# Altium PCB PCB.PcbDoc
Units mm, origin at the board's own origin, x right, y up, seen from the top; angles counter-clockwise.
Board outline 22.18 x 37.45 mm, 2 copper layers (Top Layer, Bottom Layer), stack 1.271 mm thick; 40 components, 25 nets, 127 pads, 61 vias.
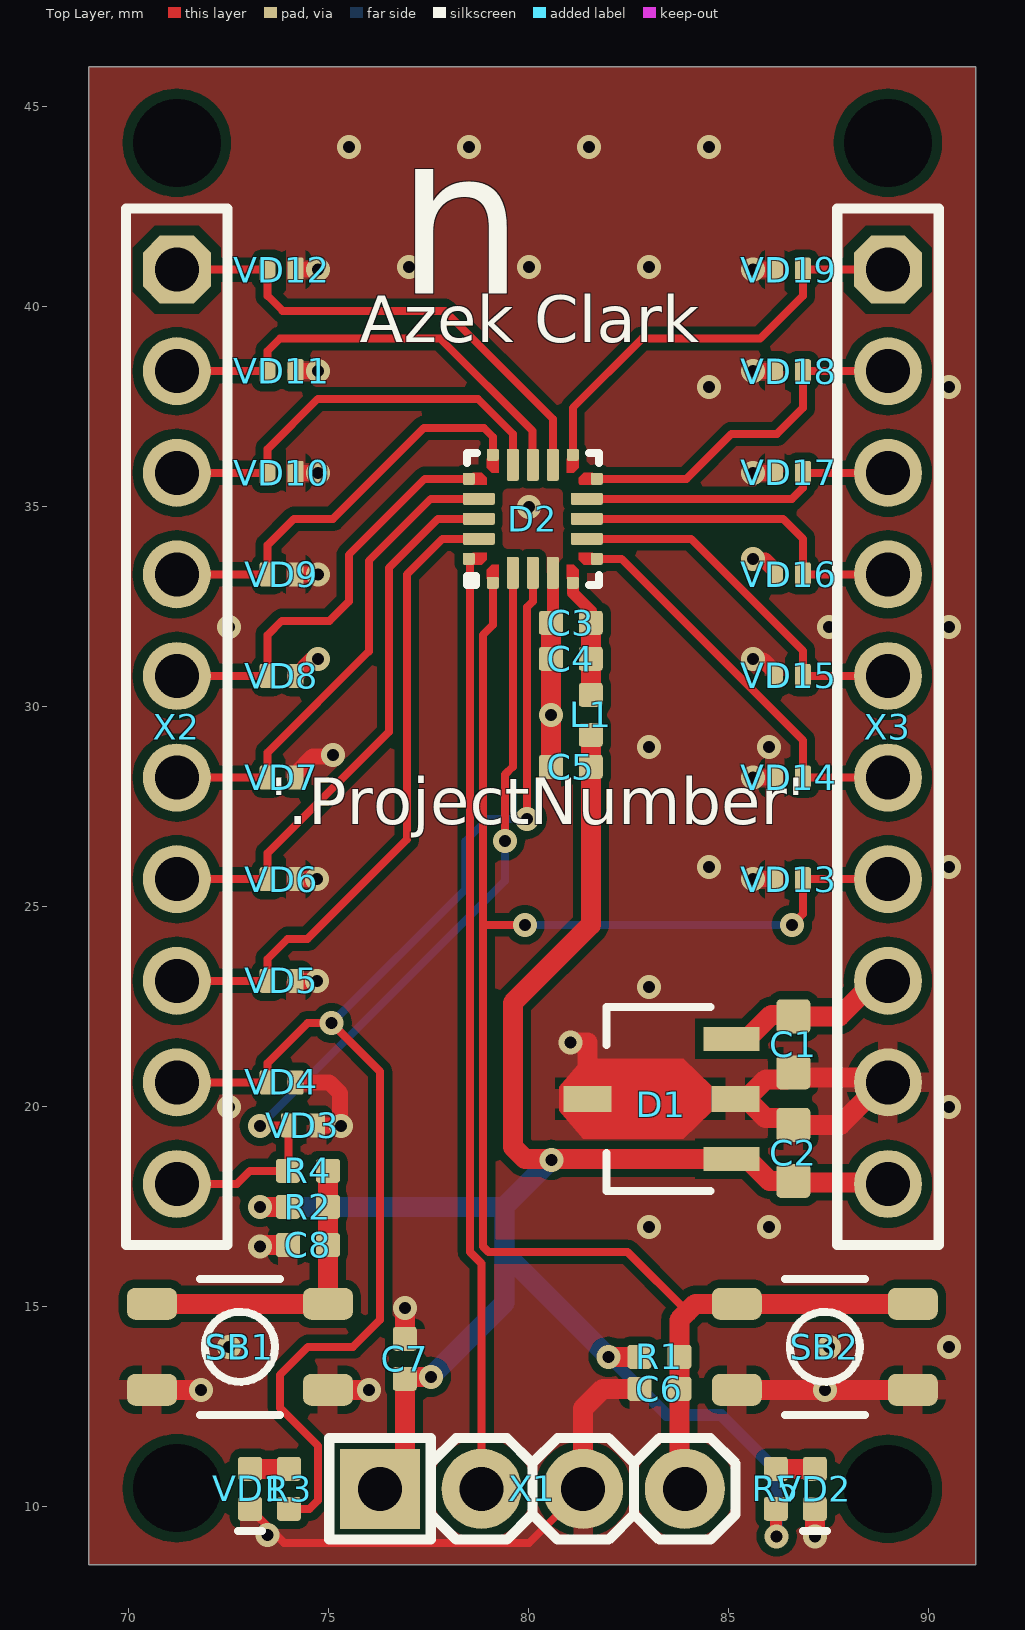
[diagram p0: Top Layer view]
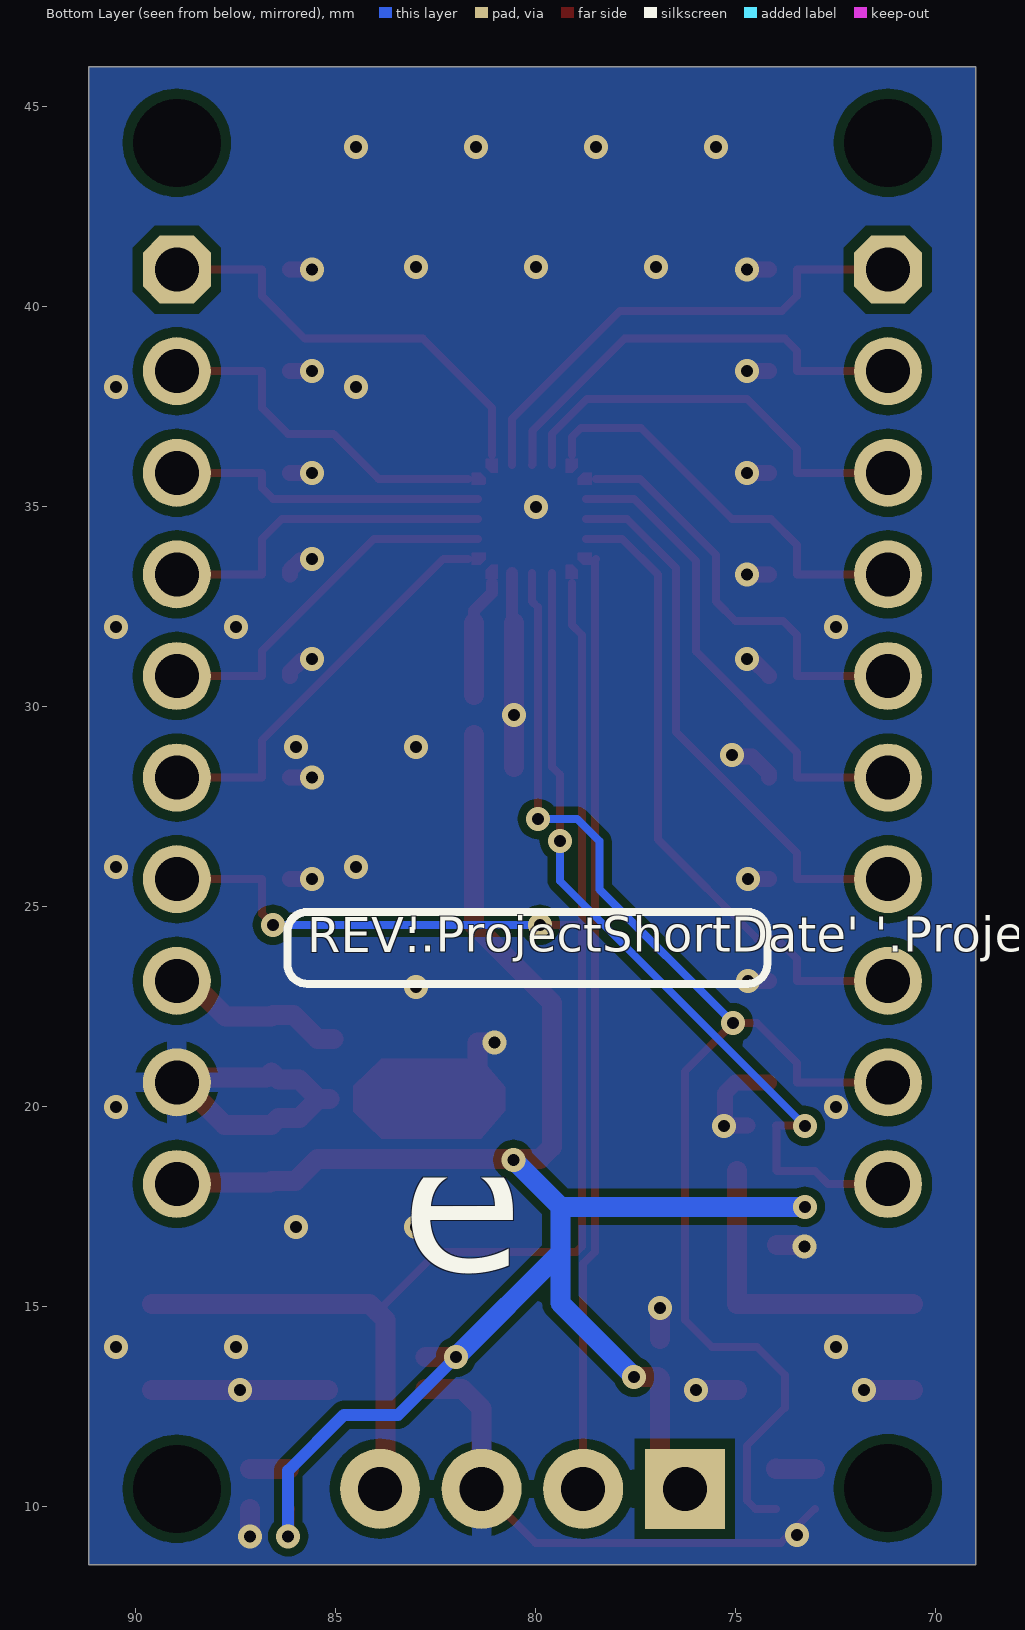
[diagram p1: Bottom Layer view, seen from below]
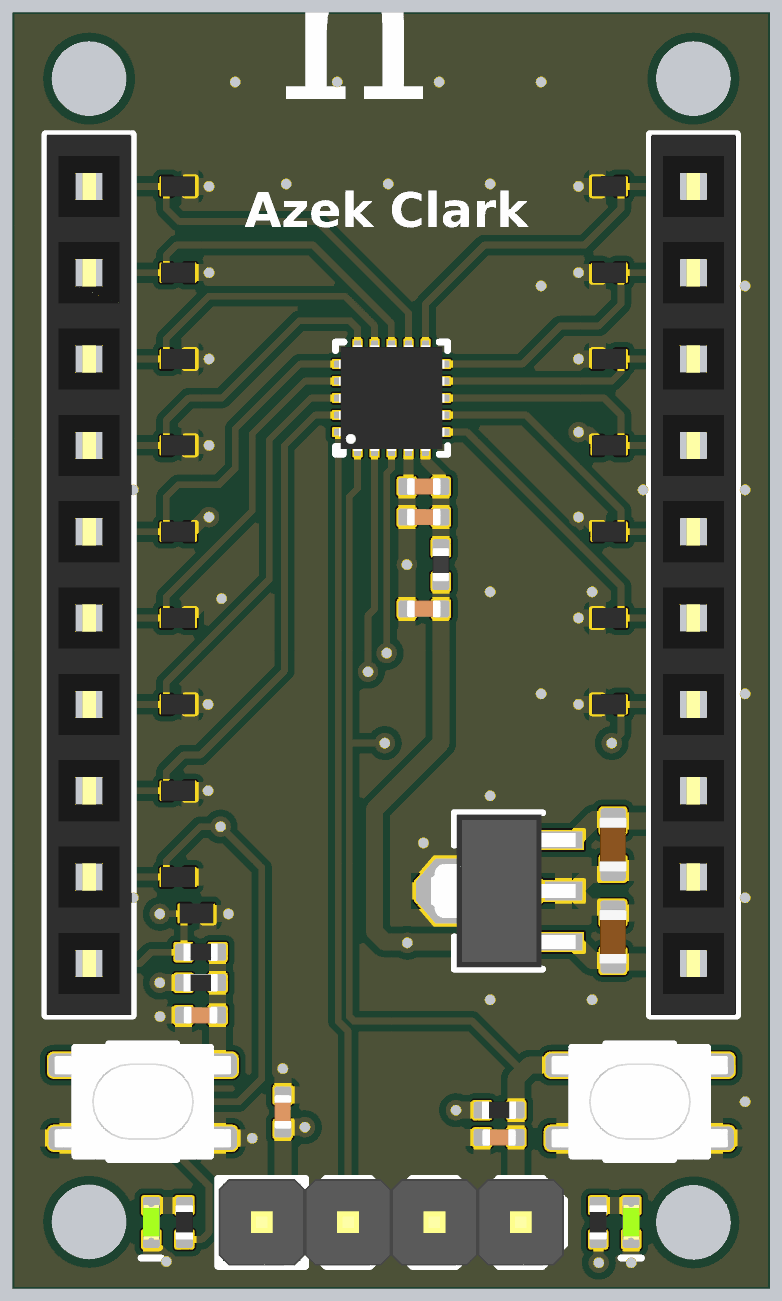
[diagram p2: 3D render of the assembled board from above, using the file's embedded part models]

## Layer stack, top to bottom
Top Solder: solder mask 0.0102, Solder Resist, Dk 3.5
Top Layer: signal copper 0.0356
Dielectric 1: dielectric 1.2, FR-4, Dk 4.8
Bottom Layer: signal copper 0.0356
Bottom Solder: solder mask 0.0102, Solder Resist, Dk 3.5

## Board outline
69,8.55 69,46 91.18,46 91.18,8.55

## Design rules (kind name [scope] priority, off if disabled: settings)
AcuteAngle [All] p1: minimum=4.50000000000000E+0001 checktracksonly=TRUE
BoardOutlineClearance [All] p1: gap=0.3 ignorepadtopadclearanceinfootprint=FALSE
Clearance Clearance_NPTH [All vs InPadClass('NPTH')] p1: gap=0.4 ignorepadtopadclearanceinfootprint=FALSE except(0: Arc-Hole Track-Hole SMDPad-Hole THPad-Hole Via-Hole Fill-Hole Poly-Hole Region-Hole Text-Hole)
Clearance Clearance_MultiLayerPad [OnLayer('Multi-Layer') and IsPad] p2: gap=0.25 ignorepadtopadclearanceinfootprint=FALSE except(0: Arc-Hole Track-Hole SMDPad-Hole THPad-Hole Via-Hole Fill-Hole Poly-Hole Region-Hole Text-Hole)
Clearance Clearance_Polygon [InPolygon] p3: gap=0.2 ignorepadtopadclearanceinfootprint=FALSE except(0: Arc-Hole Track-Hole SMDPad-Hole THPad-Hole Via-Hole Fill-Hole Poly-Hole Region-Hole Text-Hole)
Clearance [All] p4: gap=0.15 ignorepadtopadclearanceinfootprint=FALSE except(0: Arc-Hole Track-Hole SMDPad-Hole THPad-Hole Via-Hole Fill-Hole Poly-Hole Region-Hole Text-Hole; 0.127: Arc-Arc Arc-Track Track-Track)
ComponentClearance [All] p1: gap=0.254 collisioncheckmode=3 verticalgap=0.2 showdistances=FALSE
DiffPairsRouting [All] p1: maxlimit=0.254 minlimit=0.2 mostfreqgap=0.254 toplayer_minwidth=0.2 toplayer_maxwidth=0.5 toplayer_prefwidth=0.3 bottomlayer_minwidth=0.2 bottomlayer_maxwidth=0.5 bottomlayer_prefwidth=0.3 maxuncoupledlength=12.7
Height [All] p1: minheight=0 maxheight=60 prefheight=12.7
HoleSize [All] p1: absolutevalues=TRUE maxlimit=6.3 minlimit=0.3 maxpercent=80.000 minpercent=20.000
HoleToHoleClearance [All] p1: gap=0.5 allowstackedmicrovias=TRUE
MinimumAnnularRing [All] p1: minimumring=0.13
MinimumSolderMaskSliver [All] p1: minsoldermaskwidth=0.05
PasteMaskExpansion [All] p1: expansion=-0.05
PlaneClearance [All] p1: clearance=0.5
PlaneConnect [All] p1: planeconnectstyle=Relief reliefexpansion=0.5 reliefentries=4 reliefconductorwidth=0.3 reliefairgap=0.2
PolygonConnect PolygonConnect_PowerPAD [All vs InPadClass('PowerPAD')] p1: connectstyle=Relief reliefconductorwidth=1 reliefentries=4 polygonreliefangle="90 Angle" airgapwidth=0.3
PolygonConnect PolygonConnect_PadGND [InNet('GND') and IsPad] p2: connectstyle=Relief reliefconductorwidth=0.5 reliefentries=4 polygonreliefangle="90 Angle" airgapwidth=0.2
PolygonConnect PolygonConnect_Via [IsVia] p3: connectstyle=Direct reliefconductorwidth=0.254 reliefentries=4 polygonreliefangle="90 Angle" airgapwidth=0.254
PolygonConnect [All] p4: connectstyle=Relief reliefconductorwidth=0.6 reliefentries=4 polygonreliefangle="90 Angle" airgapwidth=0.3
RoomDefinition Power-LED [InComponentClass('Power-LED')] p1: confinementstyle=ConfineIn formatcopy=TRUE lockcomponents=FALSE outline 85.571,9.346 85.571,11.554 86.496,11.554 87.804,11.554 87.804,9.046 86.496,9.046 86.496,9.346
RoomDefinition PowerSupply [InComponentClass('PowerSupply')] p2: confinementstyle=ConfineIn formatcopy=TRUE lockcomponents=FALSE outline 87.344,22.992 87.344,20.134 87.344,17.421 85.886,17.421 85.886,17.546 80.361,17.546 80.361,22.854 85.886,22.854 85.886,22.992
RoomDefinition MCU-Debug [InComponentClass('MCU-Debug')] p3: confinementstyle=ConfineIn formatcopy=TRUE lockcomponents=FALSE outline 74.629,8.799 74.629,12.101 76.296,12.101 76.296,14.804 84.271,14.804 84.271,16.054 90.529,16.054 90.529,11.946 85.551,11.946 85.551,8.799
RoomDefinition MCU [InComponentClass('MCU')] p4: confinementstyle=ConfineIn formatcopy=TRUE lockcomponents=FALSE outline 82.154,27.896 79.946,27.896 79.946,32.646 78.096,32.646 78.096,36.754 82.204,36.754 82.204,32.646 82.154,32.646
RoomDefinition Connector-side-2 [InComponentClass('Connector-side-2')] p5: confinementstyle=ConfineIn formatcopy=TRUE lockcomponents=FALSE outline 85.648,25.086 85.648,41.534 87.329,41.534 87.329,42.835 90.631,42.835 90.631,16.165 87.329,16.165 87.329,25.086
RoomDefinition Connector-side-1 [InComponentClass('Connector-side-1')] p6: confinementstyle=ConfineIn formatcopy=TRUE lockcomponents=FALSE outline 69.549,16.165 69.549,42.835 72.851,42.835 72.851,41.534 74.677,41.534 74.677,20.142 75.208,20.142 75.208,18.934 72.851,18.934 72.851,16.165
RoomDefinition Button-LED [InComponentClass('Button-LED')] p7: confinementstyle=ConfineIn formatcopy=TRUE lockcomponents=FALSE outline 69.651,11.946 69.651,16.054 73.376,16.054 73.376,19.004 75.584,19.004 75.584,18.104 75.584,17.15 75.584,16.054 75.909,16.054 75.909,11.946 74.608,11.946 74.608,9.346 73.684,9.346 73.684,9.046 72.376,9.046 72.376,11.946
RoutingVias [All] p1: holewidth=0.3 width=0.7 viastyle="Through Hole" minholewidth=0.3 minwidth=0.6 maxholewidth=0.5 maxwidth=1.2
SilkToSilkClearance [All] p1: silktosilkclearance=0
SilkToSolderMaskClearance [IsPad] p1: minsilkscreentomaskgap=0.15 clearancetoexposedcopper=TRUE
SolderMaskExpansion SolderMaskExpansion_ML [OnLayer('Multi-Layer') and IsPad] p1: expansion=0.1 istentingtop=FALSE
SolderMaskExpansion SolderMaskExpansion_VIa [isVia] p2: expansion=0.102 istentingtop=TRUE
SolderMaskExpansion [All] p3: expansion=0.05 istentingtop=FALSE
UnRoutedNet [All] p1: checkbadconnections=TRUE
Width [All] p1: maxlimit=10 minlimit=0.127 preferedwidth=0.2
18 further rules are at their usual default settings.

## Classes and differential pairs
component class Power-LED: R5 VD2
component class PowerSupply: C1 C2 D1
component class MCU: C3 C4 C5 D2 L1
component class MCU-Debug: C6 C7 R1 SB2 X1
component class Connector-side-2: VD13 VD14 VD15 VD16 VD17 VD18 VD19 X3
component class Connector-side-1: VD3 VD4 VD5 VD6 VD7 VD8 VD9 VD10 VD11 VD12 X2
component class Button-LED: C8 R2 R3 R4 SB1 VD1

## Components (designator, comment, footprint, x,y, rotation, side; value= is the part's Value field where it differs from the comment)
C1 "1µF" CH0603CM 86.615,21.563 r90 top
C2 "1µF" CH0603CM 86.615,18.85 r270 top
C3 "10nF" CH0402C 81.05,32.1 r0 top
C4 "100nF" CH0402C 81.05,31.2 r0 top
C5 "100nF" CH0402C 81.05,28.5 r0 top
C6 "100nF" CH0402C 83.265,12.95 r0 top
C7 "100nF" CH0402C 76.9,13.7 r270 top
C8 "100nF" CH0402C 74.48,16.546 r0 top
D1 "L78L33ACUTR" SOT89_123 83.265,20.2 r180 top
D2 "STM8L101F3U6TR" 20-UFQFPN 80.1,34.7 r90 top
L1 "120Ω @ 100MHz" CH0402L 81.55,29.8 r90 top
R1 "100k" CH0402R 83.265,13.75 r180 top
R2 "100k" CH0402R 74.48,17.5 r180 top
R3 "150" CH0402R 74.004,10.45 r270 top
R4 "0" CH0402R 74.48,18.4 r0 top
R5 "150" CH0402R 86.175,10.45 r270 top
SB1 "\"Кнопка\"" "BUT: YTS-A017" 72.78,14 r180 top
SB2 "\"Кнопка\"" "BUT: YTS-A017" 87.4,14 r180 top
VD1 "Blue" CH0402LG 73.03,10.45 r90 top
VD2 "Blue" CH0402LG 87.15,10.45 r90 top
VD3 "Rclamp3311P-N" DFN1006-2 74.354,19.538 r0 top
VD4 "Rclamp3311P-N" DFN1006-2 73.823,20.61 r0 top
VD5 "Rclamp3311P-N" DFN1006-2 73.823,23.15 r0 top
VD6 "Rclamp3311P-N" DFN1006-2 73.823,25.69 r0 top
VD7 "Rclamp3311P-N" DFN1006-2 73.823,28.23 r0 top
VD8 "Rclamp3311P-N" DFN1006-2 73.823,30.77 r0 top
VD9 "Rclamp3311P-N" DFN1006-2 73.823,33.31 r0 top
VD10 "Rclamp3311P-N" DFN1006-2 73.823,35.85 r0 top
VD11 "Rclamp3311P-N" DFN1006-2 73.823,38.39 r0 top
VD12 "Rclamp3311P-N" DFN1006-2 73.823,40.93 r0 top
VD13 "Rclamp3311P-N" DFN1006-2 86.502,25.69 r180 top
VD14 "Rclamp3311P-N" DFN1006-2 86.502,28.23 r180 top
VD15 "Rclamp3311P-N" DFN1006-2 86.502,30.77 r180 top
VD16 "Rclamp3311P-N" DFN1006-2 86.502,33.31 r180 top
VD17 "Rclamp3311P-N" DFN1006-2 86.502,35.85 r180 top
VD18 "Rclamp3311P-N" DFN1006-2 86.502,38.39 r180 top
VD19 "Rclamp3311P-N" DFN1006-2 86.502,40.93 r180 top
X1 "*" "CON: PLS-4" 80.09,10.45 r0 top
X2 "PBSL-10" "CON: PBSL-10" 71.2,29.5 r270 top
X3 "PBSL-10" "CON: PBSL-10" 88.98,29.5 r270 top

## Footprints (in the part's own frame and the unit in brackets; to place one, negate y for a bottom-side part, rotate by r counter-clockwise, add the part's x,y. Pads: shape width x height; smd on the part's side, far side on the other; paste and mask are expansions set on the pad)
20-UFQFPN [mm] "UFQFPN20  20-lead, 3x3 mm, 0.5 mm pitch"
  rrect25% 0.3x0.3 smd: 1(-1.6,1) 5(-1.6,-1) 6(-1,-1.6) 10(1,-1.6) 11(1.6,-1) 15(1.6,1) 16(1,1.6) 20(-1,1.6)
  rrect25% 0.8x0.3 smd: 2(-1.35,0.5) 3(-1.35,0) 4(-1.35,-0.5) 12(1.35,-0.5) 13(1.35,0) 14(1.35,0.5)
  rrect25% 0.3x0.8 smd: 7(-0.5,-1.35) 8(0,-1.35) 9(0.5,-1.35) 17(0.5,1.35) 18(0,1.35) 19(-0.5,1.35)
  Top Layer region: -1.5,-1.15 -1.5,-1.15 -1.275,-1.15 -1.275,-1.15 -1.15,-1.025 -1.15,-0.85 -1.5,-0.85
  Top Layer region: -1.025,-1.15 -1.15,-1.275 -1.15,-1.5 -1.15,-1.5 -0.85,-1.5 -0.85,-1.15
  Top Layer region: 1.15,-1.5 1.15,-1.275 1.025,-1.15 0.9,-1.15 0.881,-1.154 0.865,-1.165 0.854,-1.181 0.85,-1.2 0.85,-1.2 0.85,-1.5
  Top Layer region: 1.15,-1.025 1.275,-1.15 1.5,-1.15 1.5,-1.15 1.5,-0.85 1.15,-0.85
  Top Layer region: -1.15,1.5 -1.15,1.5 -1.15,1.275 -1.15,1.275 -1.025,1.15 -0.85,1.15 -0.85,1.5
  Top Layer region: -1.15,1.025 -1.275,1.15 -1.5,1.15 -1.5,1.15 -1.5,0.85 -1.15,0.85
  Top Layer region: 1.025,1.15 1.15,1.275 1.15,1.5 1.15,1.5 0.85,1.5 0.85,1.15
  Top Layer region: 1.5,1.15 1.5,1.15 1.275,1.15 1.275,1.15 1.15,1.025 1.15,0.85 1.5,0.85
  silkscreen extent -1.65,-1.65 1.65,1.65, body extent -1.55,-1.55 1.55,1.55, height 0.55
"BUT: YTS-A017" [mm] "Tactile button 5.2x3.4x2.5 SMD"
  rrect50% 1.25x0.8 smd: 1(-2.2,1.075) 1(2.2,1.075) 2(-2.2,-1.075) 2(2.2,-1.075)
  silkscreen extent -1,-1.7 1,1.7, body extent -2.6,-1.7 2.6,1.7, height 2.5
CH0402C [mm]
  rrect25% 0.6x0.6 smd: 1(-0.5,0) 2(0.5,0)
  body extent -0.5,-0.25 0.5,0.25, height 0.5
CH0402L [mm]
  rrect25% 0.6x0.6 smd: 1(-0.5,0) 2(0.5,0)
  body extent -0.5,-0.25 0.5,0.25, height 0.5
CH0402LG [mm]
  rrect25% 0.6x0.6 smd: 1(0.5,0) 2(-0.5,0)
  silkscreen extent -1.05,-0.3 -1.05,0.3, body extent -0.5,-0.25 0.5,0.25, height 0.4
CH0402R [mm]
  rrect25% 0.6x0.6 smd: 1(-0.5,0) 2(0.5,0)
  body extent -0.5,-0.25 0.5,0.26, height 0.33
CH0603CM [mm] "Chip Capacitor, 2-Leads, Body 1,53x0,85mm, IPC Medium Density"
  rrect25% 0.85x0.85 smd: 1(-0.7,0) 2(0.7,0)
  body extent -0.8,-0.4 0.8,0.4, height 0.6
"CON: PBSL-10" [mm] "Female header 2.54mm pitch, pin lengh 11mm"
  oct 1.7x1.7 hole 1.1: 1(-11.43,0)
  round 1.7 hole 1.1: 2(-8.89,0) 3(-6.35,0) 4(-3.81,0) 5(-1.27,0) 6(1.27,0) 7(3.81,0) 8(6.35,0) 9(8.89,0) 10(11.43,0)
  silkscreen extent -12.95,-1.27 12.95,1.27, body extent -12.95,-1.25 12.95,1.25, height 8.5
"CON: PLS-4" [mm] "PLS-40 4 pin header"
  rect 2x2 hole 1.1: 1(-3.81,0)
  round 2 hole 1.1: 2(-1.27,0) 3(1.27,0) 4(3.81,0)
  silkscreen extent -5.08,-1.27 5.08,1.27, body extent -5.08,-1.27 5.08,1.27, height 8.54
DFN1006-2 [mm] "2-Leads, Body 1.0x0.6mm (max), Pitch 0,65mm"
  rrect25% 0.4x0.6 smd: 1(0.35,0) 2(-0.35,0)
  body extent -0.5,-0.3 0.5,0.3, height 0.6
SOT89_123 [mm] "SOT89, 3-Leads, Body 4,50x2,45mm, Pitch 1,50mm, Lead Span 4,1mm, IPC Medium Density"
  rect 1.4x0.6 smd: 1(-1.8,1.5) 3(-1.8,-1.5)
  rect 1.2x0.65 smd: 2(-1.9,0)
  rect 1.2x0.65 smd mask+0: 2(1.8,0)
  round 0.5 on Mech1: ""(-1.8,1.8)
  Top Layer region: -1.3,0.325 -0.6,1 1.9,1 2.5,0.3 2.5,-0.3 1.9,-1 -0.6,-1 -1.3,-0.325
  silkscreen extent -1.28,-2.3 1.32,2.3, body extent -2.25,-2.25 2,2.25, height 1.54

## Part data
C1 C2 C3 C4 C5 C6 C7 C8: library part Capacitor
D1: library part L78LxxACUTR, "LDO", Manufacturer="ST Microelectronics", ComponentKind="SOT-89, 100mA", HelpURL=https://www.st.com/resource/en/datasheet/l78l.pdf, Model=L78L33ACUTR
D2: library part STM8L101F3U6, "STM8", Manufacturer="ST Microelectronics", ComponentKind="UFQFPN20, 1.65-3.6V, 16MHz, 1.5Kb RAM, 2Kb Flash", HelpURL=https://lcsc.com/product-detail/ST-Microelectronics_STMicroelectronics-STM8L101F3U6TR_C111168.html, Model=STM8L101F3U6TR
L1: library part Inductor
R1 R2 R3 R4 R5: library part Resistor
SB1 SB2: library part 1-Button, "Button, no latching"
VD1 VD2: library part LED
VD3 VD4 VD5 VD6 VD7 VD8 VD9 VD10 VD11 VD12 VD13 VD14 VD15 VD16 VD17 VD18 VD19: library part TVS-diod, Manufacturer=BORN, ComponentKind="3.3V, 8V. 10A", HelpURL=https://www.lcsc.com/product-detail/ESD-Protection-Devices_BORN-Rclamp3311P-N_C406234.html, Model=Rclamp3311P-N
X1: library part 4-Connector
X2 X3: library part 10-Connector, Model=PBSL-10

## Free pads (board coordinates)
  round 0 hole 2.2 unplated paste+0 mask+0.1: 0(71.2,10.465) 0(71.2,44.1) 0(88.98,44.1)
  round 0 hole 2.2 unplated paste+0: 0(88.98,10.45)

## Via types
v1: diameter 0.6, hole 0.3, Top Layer to Bottom Layer, tented both sides, 61 vias

## Nets (pads, with @x,y where several pads share a name; then routed paths per layer and width w, separated by ;. In a path a pad name is that pad's centre, name@x,y a point inside that pad or via, vN(x,y) a via of type N, cw(c..) or ccw(c..) an arc to the next point about the centre after c; other vN are vias at no path point)
GND: C1.1 C2.1 C3.1 C4.1 C5.1 C6.1 C7.1 C8.1 D1.2 D2.4 SB1.1 SB2.1 VD1.2 VD2.2 VD3.1 VD4.1 VD5.1 VD6.1 VD7.1 VD8.1 VD9.1 VD10.1 VD11.1 VD12.1 VD13.1 VD14.1 VD15.1 VD16.1 VD17.1 VD18.1 VD19.1 X1.3 X3.9 | length 49.2
  Top Layer w0.2: VD1.2 v1@73.63,9.35 ; v1(73.473,9.299) 73.524,9.35 v1@73.63,9.35 ; X1.3 80.01,9.1 73.88,9.1 v1@73.63,9.35
  Top Layer w0.3: C3.1 80.6,32.15 D2.4
  Top Layer w0.4: VD4.1 75.007,20.61 75.281,20.336 v1@75.281,19.544 ; VD5.1 v1(74.7,23.15) ; VD6.1 v1(74.7,25.69) ; VD7.1 74.173,28.33 74.605,28.762 75.062,28.762 v1(75.1,28.8) ; VD8.1 74.603,31.2 v1(74.73,31.2) ; VD9.1 v1(74.73,33.31) ; VD10.1 v1(74.73,35.85) ; VD11.1 v1(74.73,38.39) ; VD12.1 v1(74.73,40.93) ; VD3.1@74.71,19.531 v1@75.294,19.531 ; v1(85.6,25.69) VD13.1 ; v1(85.6,28.23) VD14.1 ; v1(85.6,31.2) 85.638,31.162 85.86,31.162 86.152,30.87 VD15.1 ; v1(85.6,33.7) 85.638,33.662 85.9,33.662 86.152,33.41 VD16.1 ; v1(85.6,35.85) VD17.1 ; v1(85.6,38.39) VD18.1 ; v1(85.6,40.93) VD19.1
  Top Layer w0.5: SB1.1@70.58,12.925 v1(71.8,12.925) ; v1(73.286,16.507) 73.326,16.546 C8.1 ; SB1.1@74.98,12.925 v1(76,12.925) ; v1@75.281,19.544 75.294,19.531 v1(75.3,19.525) ; C7.1 v1(76.9,14.973) ; C5.1 v1(80.55,29.8) C4.1 C3.1 ; v1(81.038,21.612) 81.465,21.612 D1.2@81.465,20.2 ; X1.3 81.36,12.46 81.85,12.95 C6.1 ; D1.2@85.165,20.2 D1.2@85.44,20.2 ; SB2.1@85.2,12.925 v1(87.4,12.925) SB2.1@89.6,12.925 ; v1(87.15,9.263) VD2.2 ; D1.2@85.44,20.2 85.915,19.725 86.44,19.725 C2.1 87.79,19.55 88.85,20.61 X3.9 88.854,20.736 86.741,20.736 C1.1 86.44,20.687 85.927,20.687 D1.2@85.44,20.2
  other v1: 72.5,14 87.5,14 90.5,14 83,17 86,17 72.5,20 90.5,20 83,23 84.5,26 90.5,26 83,29 86,29 72.5,32 87.5,32 90.5,32 80,35 84.5,38 90.5,38 77,41 80,41 83,41 75.5,44 78.5,44 81.5,44 84.5,44
NetR3_1: R3.1 VD1.1 | length 1
  Top Layer w0.5: VD1.1@73.03,10.95 73.99,10.95 73.997,10.957 R3.1
NetR5_1: R5.1 VD2.1 | length 1
  Top Layer w0.5: R5.1 VD2.1
NRST: C6.2 D2.1 R1.1 SB2.2 VD13.2 X1.4 X3.7 | length 43.9
  Top Layer w0.2: D2.1 79.1,32.044 78.856,31.8 78.856,24.55 ; v1(79.9,24.55) 78.856,24.55 ; 83.965,14.875 82.469,16.371 78.991,16.371 78.856,16.507 78.856,24.55 ; v1(86.577,24.55) 86.852,24.825 VD13.2 X3.7
  Top Layer w0.5: X1.4 83.765,10.585 C6.2 R1.1 83.765,14.675 83.965,14.875 84.165,15.075 85.2,15.075 SB2.2@89.6,15.075
  Bottom Layer w0.2: v1(79.9,24.55) v1(86.577,24.55)
PA2: D2.2 R4.1 VD3.2 X2.10 | length 21.2
  Top Layer w0.2: X2.10 72.7,18.07 73.03,18.4 R4.1 73.992,18.412 73.992,19.525 VD3.2@73.998,19.531 ; v1(73.28,19.525) 73.286,19.531 VD3.2@73.998,19.531 ; VD3.2 VD3.2@73.998,19.531 ; v1(79.406,26.65) 79.406,28.306 79.6,28.5 D2.2
  Bottom Layer w0.2: v1(73.28,19.525) 79.406,25.651 v1(79.406,26.65)
PA3: D2.3 R3.2 VD4.2 X2.9 | length 34
  Top Layer w0.2: X2.9 VD4.2 73.473,21.093 74.469,22.089 75.066,22.089 v1(75.069,22.092) 76.28,20.881 76.28,14.675 75.605,14 74.48,14 73.78,13.3 73.78,12.475 74.73,11.525 74.73,10.161 74.519,9.95 R3.2 ; v1(79.956,27.2) 79.956,32.489 80.1,32.634 D2.3
  Bottom Layer w0.2: v1(75.069,22.092) 78.413,25.435 78.413,26.64 78.973,27.2 v1(79.956,27.2)
PB0: D2.7 VD15.2 X3.5 | length 9.3
  Top Layer w0.2: D2.7 84.052,34.2 86.852,31.4 VD15.2 X3.5
PB1: D2.8 VD16.2 X3.4 | length 8.6
  Top Layer w0.2: D2.8 86.352,34.7 86.852,34.2 VD16.2 X3.4
PB2: D2.9 VD17.2 X3.3 | length 8
  Top Layer w0.2: D2.9 86.577,35.2 86.852,35.475 VD17.2 X3.3
PB3: D2.10 VD18.2 X3.2 | length 8.9
  Top Layer w0.2: D2.10 83.94,35.7 85.065,36.825 86.202,36.825 86.852,37.475 VD18.2 X3.2
PB4: D2.11 VD19.2 X3.1 | length 10.9
  Top Layer w0.2: D2.11 81.1,37.475 82.828,39.203 85.78,39.203 86.852,40.275 VD19.2 X3.1
PB5: D2.12 VD12.2 X2.1 | length 12.5
  Top Layer w0.2: X2.1 VD12.2 73.473,40.275 73.848,39.9 77.9,39.9 80.6,37.2 D2.12
PB6: D2.13 VD11.2 X2.2 | length 11.3
  Top Layer w0.2: X2.2 VD11.2 73.473,38.9 73.775,39.203 77.788,39.203 80.09,36.9 80.09,36.06 D2.13
PB7: D2.14 VD10.2 X2.3 | length 10.7
  Top Layer w0.2: X2.3 VD10.2 73.473,36.448 74.725,37.7 78.725,37.7 79.6,36.825 D2.14
PC0: D2.15 VD9.2 X2.4 | length 10.4
  Top Layer w0.2: X2.4 VD9.2 73.473,34.043 74.13,34.7 75.105,34.7 77.38,36.975 78.875,36.975 79.1,36.75 D2.15
PC1: D2.16 VD8.2 X2.5 | length 10.6
  Top Layer w0.2: X2.5 VD8.2 73.473,31.797 73.826,32.15 75.016,32.15 75.5,32.634 75.5,33.8 77.4,35.7 D2.16
PC2: D2.17 VD7.2 X2.6 | length 12.1
  Top Layer w0.2: X2.6 VD7.2 73.473,28.861 76,31.388 76,33.65 77.55,35.2 D2.17
PC3: D2.18 VD6.2 X2.7 | length 14.1
  Top Layer w0.2: X2.7 VD6.2 73.473,26.343 76.5,29.37 76.5,33.47 77.73,34.7 D2.18
PC4: D2.19 VD5.2 X2.8 | length 16.3
  Top Layer w0.2: X2.8 VD5.2 73.473,23.7 73.973,24.2 74.469,24.2 76.95,26.681 76.95,33.304 77.846,34.2 D2.19
PD0: D2.6 VD14.2 X3.6 | length 10.1
  Top Layer w0.2: D2.6 82.315,33.7 86.852,29.163 VD14.2 X3.6
SWIM: D2.20 X1.2 | length 23.4
  Top Layer w0.2: D2.20 78.529,33.671 78.529,16.371 78.82,16.08 X1.2
USER-BUTTON: C8.2 R2.1 R4.2 SB1.2 | length 7.7
  Top Layer w0.5: SB1.2@70.58,15.075 74.98,15.075 R4.2
VDD-IN: C1.2 D1.3 X3.8 | length 4.5
  Top Layer w0.5: D1.3 85.465,21.7 86.065,22.3 86.577,22.3 C1.2 87.768,22.263 88.655,23.15 X3.8
VDD-MAIN: C2.2 C5.2 C7.2 D1.1 L1.1 R1.2 R2.2 R5.2 X1.1 X3.10 | length 50.2
  Top Layer w0.3: R5.2 86.186,9.94 86.186,9.273 v1(86.196,9.263)
  Top Layer w0.5: v1(73.28,17.5) R2.2 ; X1.1 76.9,11.07 C7.2 76.95,13.25 v1(77.55,13.25) ; L1.1 C5.2 81.55,24.55 79.6,22.6 79.6,19 79.9,18.7 D1.1 85.465,18.7 86.015,18.15 C2.2 86.655,18.11 88.94,18.11 X3.10 ; v1(81.995,13.75) R1.2
  Bottom Layer w0.3: v1(81.995,13.75) 83.445,12.3 84.8,12.3 86.196,10.904 v1(86.196,9.263)
  Bottom Layer w0.5: v1(73.28,17.5) 79.389,17.5 ; v1(77.55,13.25) 79.389,15.089 79.389,16.356 ; v1(80.563,18.674) 79.389,17.5 ; v1(81.995,13.75) 79.389,16.356 ; 79.389,16.356 79.389,17.5
VDD-MCU: C3.2 C4.2 D2.5 L1.2 | length 3
  Top Layer w0.3: D2.5 81.1,32.85 81.55,32.4 C3.2
  Top Layer w0.5: L1.2 C4.2 C3.2
pads on no net: D1.

## Polygon pours and split planes (outlines as drawn)
GND on Bottom Layer "GND_L02_P000" (solid, remove dead copper, pour order 0): 69,46 69,8.55 91.18,8.55 91.18,46
GND on Top Layer "GND_L01_P002" (solid, remove dead copper, pour order 2): 69,46 69,8.55 91.18,8.55 91.18,46

## Silkscreen, mask and mechanical layers (free items; w line width, h text height)
Top Overlay:
  text "Azek Clark" at 75.775,38.722 h2
  text "h" at 76.707,38.42 h10
  text "'.ProjectNumber'" at 73.533,26.673 h2
Bottom Overlay:
  lines w0.2: 86.215,24.372 ccw(c85.715,24.372) 85.715,24.872 74.715,24.872 ccw(c74.715,24.372) 74.215,24.372 74.215,23.572 ccw(c74.715,23.572) 74.715,23.072 85.715,23.072 ccw(c85.715,23.572) 86.215,23.572 86.215,24.372 ; 86.215,24.372 86.215,24.372
  text "'.ProjectShortDate' '.ProjectRevision'" at 83.215,23.582 h1.5
  text "REV:" at 85.715,23.572 h1.5
  text "e" at 83.387,14 h10
Board Shape:
  the board outline again, w0.1